# Altium PCB PCB1.PcbDoc
Units mm, origin at the board's own origin, x right, y up, seen from the top; angles counter-clockwise.
Board outline 66.29 x 50.16 mm, 2 copper layers (Top Layer, Bottom Layer); 29 components, 11 nets, 71 pads, 0 vias.
Unrouted connection lines stored in the file: 1.
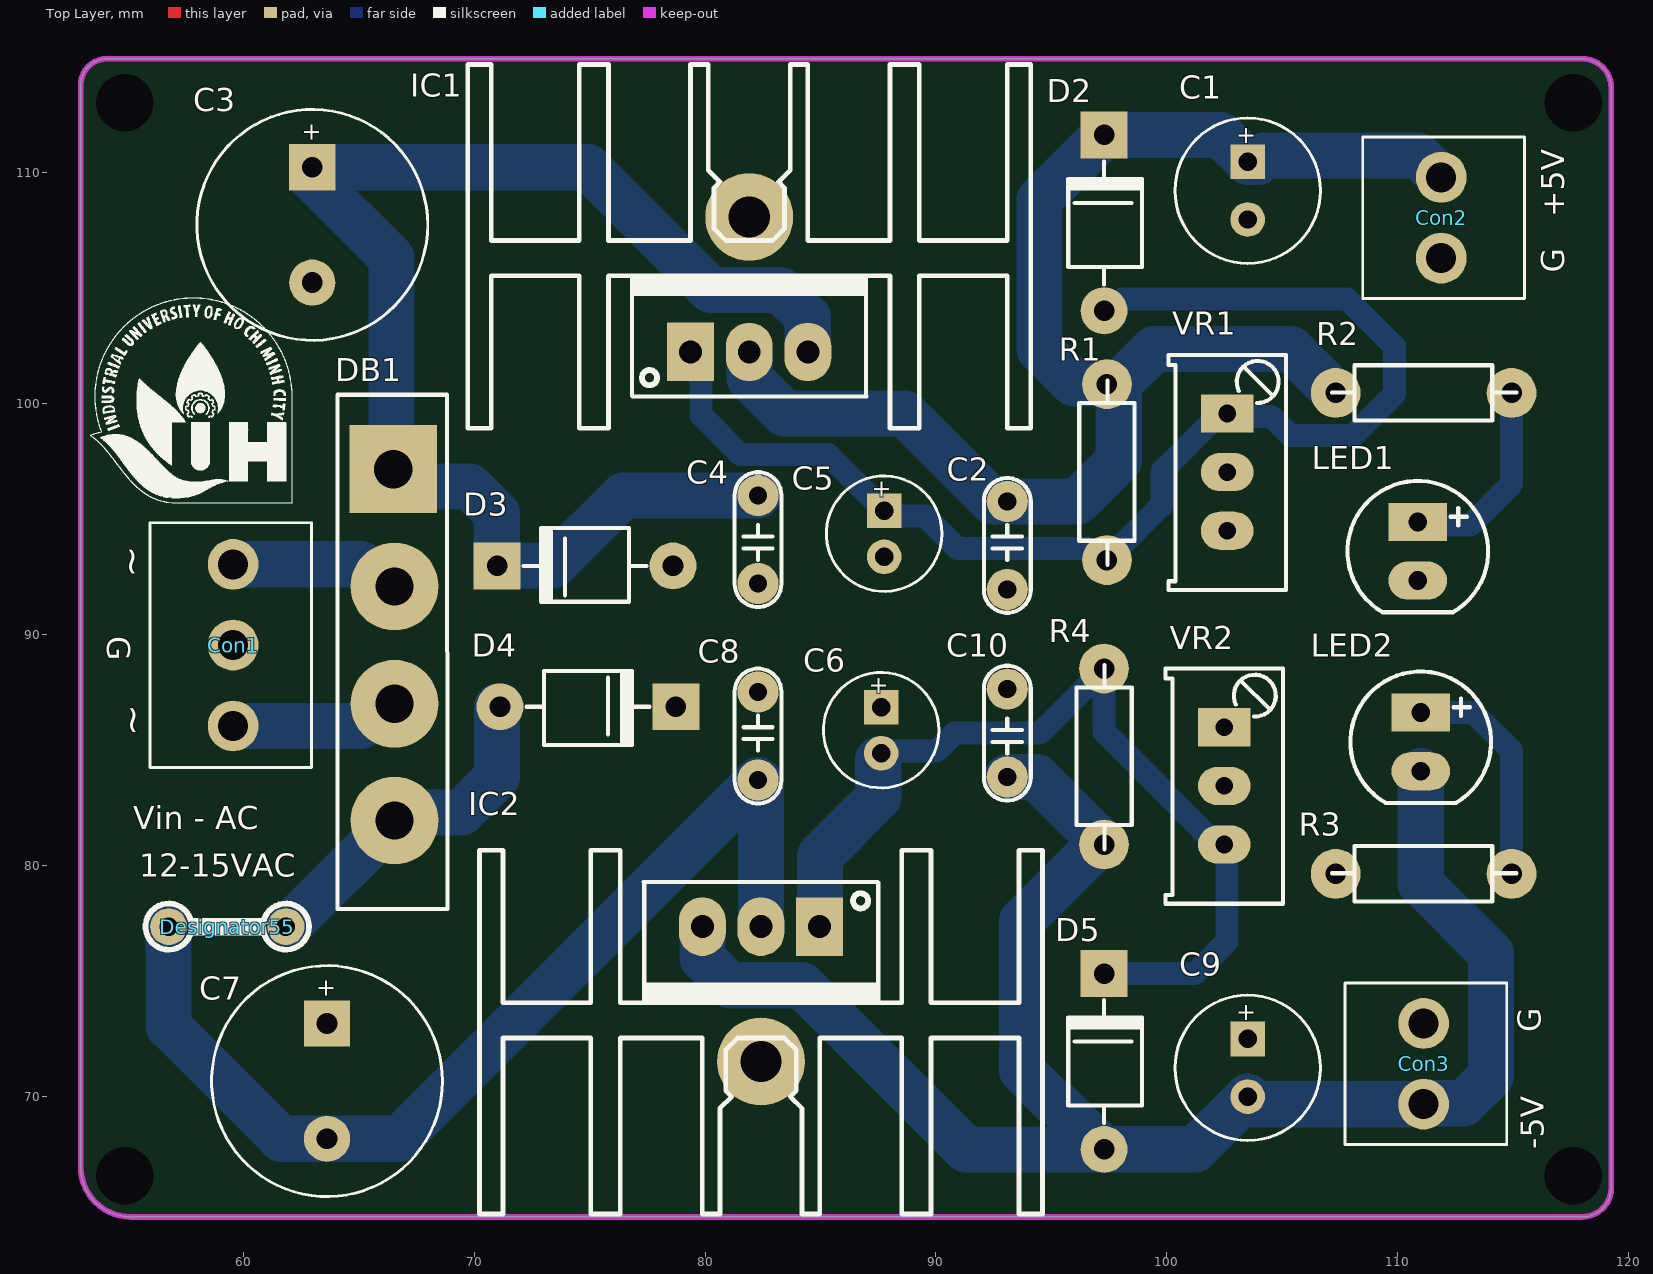
[diagram p0: Top Layer view]
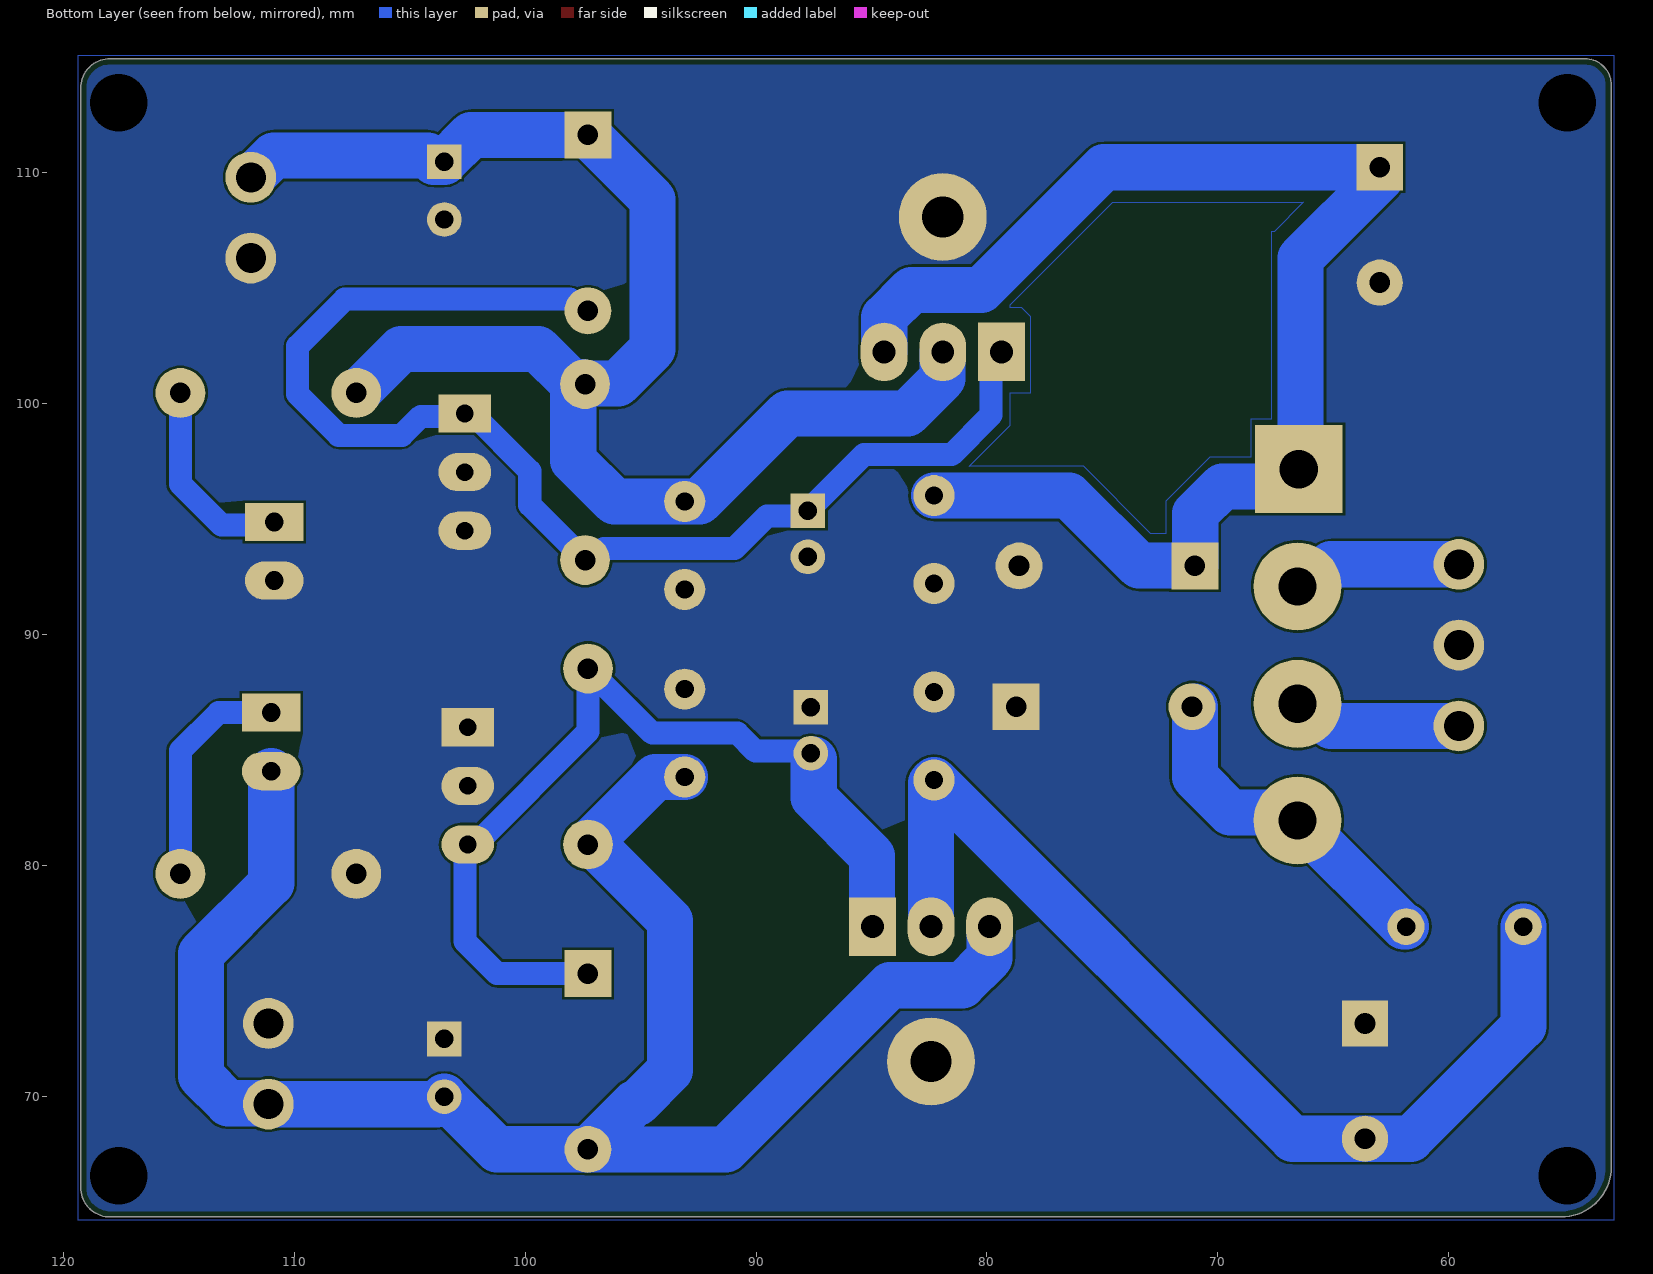
[diagram p1: Bottom Layer view, seen from below]
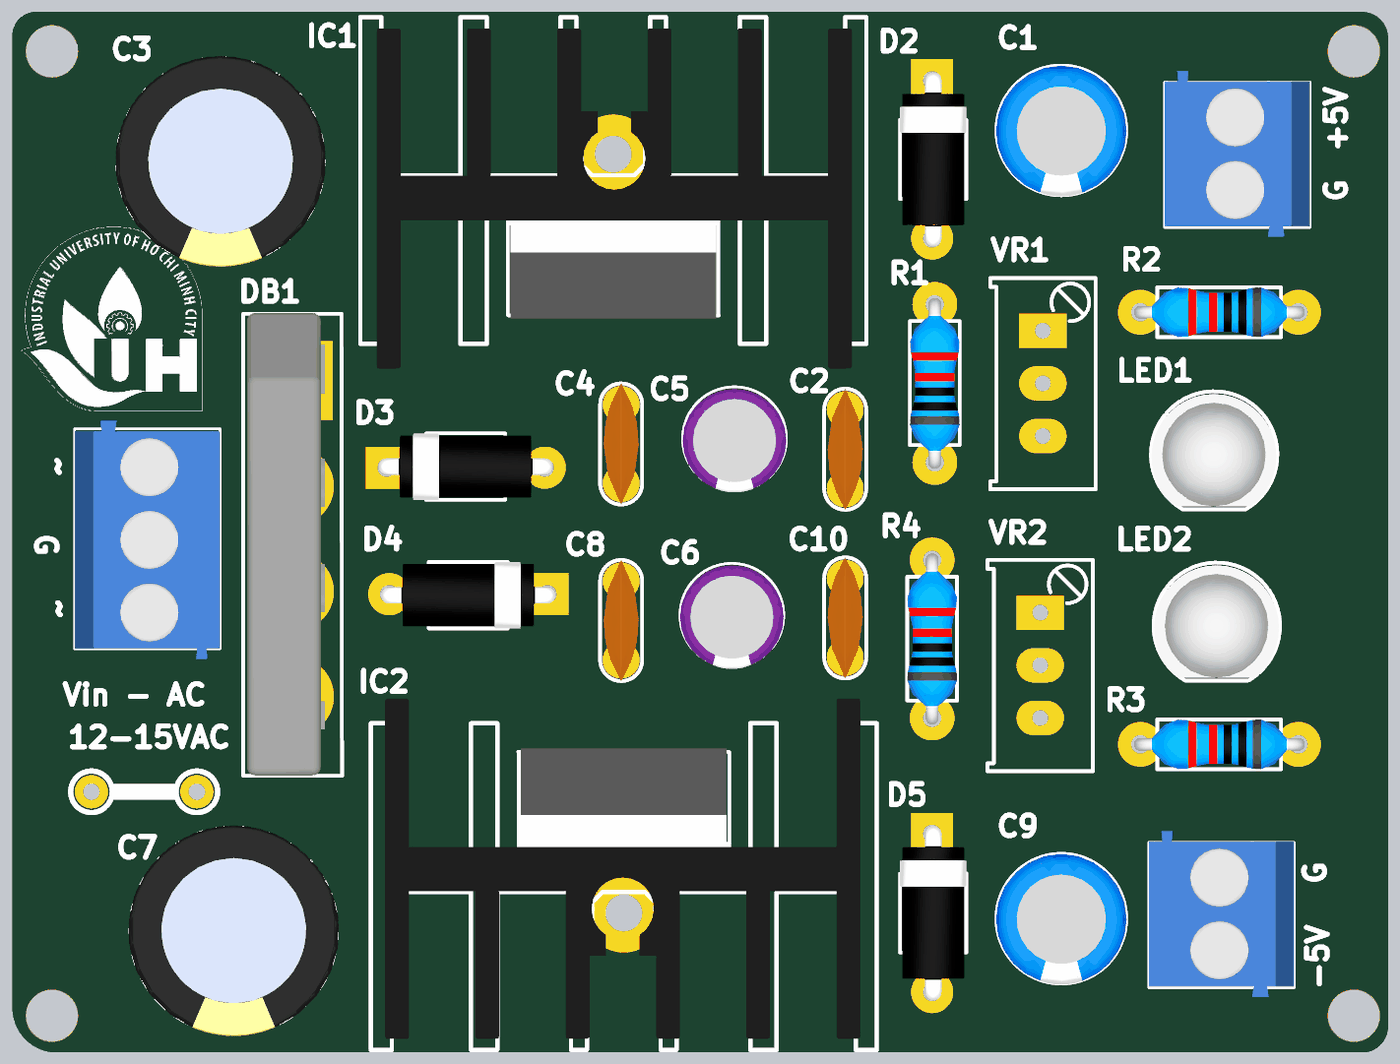
[diagram p2: 3D render of the assembled board from above, using the file's embedded part models]

## Layer stack, top to bottom
Top Solder: solder mask 0.0102, Solder Resist, Dk 3.5
Top Layer: signal copper 0.0356
Dielectric 1: dielectric 0.32, FR-4, Dk 4.8
Bottom Layer: signal copper 0.0356
Bottom Solder: solder mask 0.0102, Solder Resist, Dk 3.5

## Board outline
52.959,66.938 52.959,113.792 cw(c54.102,113.792) 54.102,114.935 54.991,114.935 117.094,114.935 117.983,114.935 cw(c117.983,113.665) 119.253,113.665 119.253,66.04 cw(c117.983,66.04) 117.983,64.77 55.127,64.77 cw(c55.127,66.938)

## Design rules (kind name [scope] priority, off if disabled: settings)
BoardOutlineClearance [All] p1: gap=0.25 ignorepadtopadclearanceinfootprint=FALSE
Clearance [All] p1: gap=0.1 ignorepadtopadclearanceinfootprint=FALSE
PolygonConnect [All] p1: connectstyle=Direct reliefconductorwidth=0.254 reliefentries=4 polygonreliefangle="90 Angle" airgapwidth=0.254
RoutingLayers [All] p1: top layer_v5=FALSE bottom layer_v5=TRUE
RoutingVias [All] p1: holewidth=0.711 width=1.27 viastyle="Through Hole" minholewidth=0.711 minwidth=1.27 maxholewidth=0.711 maxwidth=1.27
SolderMaskExpansion [All] p1: expansion=0 istentingtop=FALSE
SupplyNets "Schematic Supply Nets" [InNet('GND')] p1: voltage=0.000
Width [All] p1: maxlimit=3 minlimit=1 preferedwidth=2
29 further rules are at their usual default settings.

## Components (designator, comment, footprint, x,y, rotation, side; value= is the part's Value field where it differs from the comment)
C1 "470uF" CA-ALU-6.3 103.505,109.22 r270 top
C2 "100nF" CN1.5 93.091,93.98 r270 top value=33pF
C3 "2200uF" CA-ALU-10 62.992,107.736 r270 top
C4 "100nF" CN1.5 82.296,93.98 r90 top value=33pF
C5 "10uF" CA-ALU-5 87.757,94.361 r270 top
C6 "10uF" CA-ALU-5 87.63,85.852 r270 top
C7 "2200uF" CA-ALU-10 63.627,70.652 r270 top
C8 "100nF" CN1.5 82.296,85.725 r270 top value=33pF
C9 "470uF" CA-ALU-6.3 103.505,71.227 r270 top
C10 "100nF" CN1.5 93.091,85.598 r90 top value=33pF
Con1 "JP3" KF3-3.5 59.563,89.535 r270 top
Con2 "JP2" KF2-3.5 111.887,108.049 r90 top
Con3 "JP2" KF2-3.5 111.125,71.402 r90 top
D2 "Diode" DIO-1A-SMALL 97.282,102.743 r270 top value=1N5007
D3 "Diode" DIO-1A-SMALL 79.883,92.964 r0 top value=1N5007
D4 "Diode" DIO-1A-SMALL 69.85,86.868 r180 top value=1N5007
D5 "Diode" DIO-1A-SMALL 97.282,66.421 r270 top value=1N5007
DB1 "Diode Brideg" "DIO-Bri 5A" 66.548,97.155 r270 top value="Cau 1A"
Designator55 "J1" STRAP-5.08 56.769,77.343 r0 top
IC1 "LM317" TO220H2 81.915,102.235 r0 top
IC2 "LM337" TO220H2 82.423,77.343 r180 top
LED1 "LED" LED-5-RED 110.871,94.869 r270 top value="LED 3 ly Single Colour"
LED2 "LED" LED-5-RED 110.998,86.614 r270 top value="LED 3 ly Single Colour"
R1 "120" RES-1/4W-SMALL 97.409,96.774 r90 top
R2 "220" RES-1/4W-SMALL 111.379,100.457 r180 top
R3 "220" RES-1/4W-SMALL 111.379,79.629 r180 top
R4 "120" RES-1/4W-SMALL 97.282,84.455 r90 top
VR1 "5k" VR-S3 102.616,99.568 r270 top value="Volume 50k"
VR2 "5k" VR-S3 102.489,85.979 r270 top value="Volume 50k"

## Footprints (in the part's own frame and the unit in brackets; to place one, negate y for a bottom-side part, rotate by r counter-clockwise, add the part's x,y. Pads: shape width x height; smd on the part's side, far side on the other; paste and mask are expansions set on the pad)
CA-ALU-5 [mm] "Polarized capacitors, Aluminum Electrolytic Capacitors, 2-Leads, Body 5x11x2x0.5"
  rect 1.5x1.5 hole 0.8: 1(-1,0)
  round 1.5 hole 0.8: 2(1,0)
  silkscreen extent -2.5,-2.5 2.5,2.5, body extent -2.41,-2.5 2.59,2.5, height 11
CA-ALU-6.3 [mm] "Polarized capacitors, Aluminum Electrolytic Capacitors, 2-Leads, Body 6.3x15x2.5x0.5"
  rect 1.5x1.5 hole 0.8: 1(-1.25,0)
  round 1.5 hole 0.8: 2(1.25,0)
  silkscreen extent -3.15,-3.15 3.15,3.15, body extent -3.12,-3.15 3.18,3.15, height 11
CA-ALU-10 [mm] "Polarized capacitors, Aluminum Electrolytic Capacitors, 2-Leads, Body 10x20x5x0.6"
  rect 2x2 hole 0.9: 1(-2.5,0)
  round 2 hole 0.9: 2(2.5,0)
  silkscreen extent -5,-5 5,5, body extent -5.08,-5.08 5.08,5.08, height 20.52
CN1.5 [mil]
  round 70 hole 31: 1(-70,0) 2(80,0)
  silkscreen extent -110,-40 120,40, body extent -110,-33 120,33, height 235
DIO-1A-SMALL [mil] "Diode 1A, W 100mil, L 350mil"
  round 80 hole 35: 1(-50,0)
  rect 80x80 hole 35: 2(-350,0)
  silkscreen extent -305,-61 -95,65, body extent -366,-61 -34,65, height 122
"DIO-Bri 5A" [mil] "Brigde 5A"
  rect 150x150 hole 65: 1(0,-2)
  round 150 hole 65: 2(200,0) 3(400,0) 4(599,0)
  silkscreen extent -127,-97 750,90, body extent -129,-90 749,58, height 937
KF2-3.5 [mm] "3,50mm - modular - blue - Horizontal wire entry - Pressure clamp - 8,4mm height - 02p"
  round 2.2 hole 1.3: 1(-1.75,0) 2(1.75,0)
  silkscreen extent -3.5,-3.6 3.5,3.4, body extent -3.95,-3.6 4.05,3.4, height 8.41
KF3-3.5 [mm] "3,50mm - modular - blue - Horizontal wire entry - Pressure clamp - 8,4mm height - 03p"
  round 2.2 hole 1.3: 1(-3.5,0) 2(0,0) 3(3.5,0)
  silkscreen extent -5.3,-3.6 5.3,3.4, body extent -5.7,-3.6 5.8,3.4, height 8.41
LED-5-RED [mil] "LED 2 PIN, 5 ly , Only colour,pin to pin 100mil"
  rect 65x100 hole 32: 1(0,0)
  oval 65x100 hole 32: 2(100,0)
  silkscreen extent -70,-120 154,120, body extent -65,-119 149,118, height 339
RES-1/4W-SMALL [mil]
  round 85 hole 35: 1(-140,0) 2(160,0)
  silkscreen extent -148,-47 166,47, body extent -152,-47 172,47, height 97
STRAP-5.08 [mm]
  round 1.6 hole 0.8: 1(0,0) 2(5.08,0)
  silkscreen extent -1,-1 6.08,1, body extent -0.41,-0.41 5.48,0.41, height 0.9
TO220H2 [mil] "TO-220 - 1-2-3"
  round 150 hole 70: 0(0,230)
  rect 80x100 hole 39: 1(-100,0)
  oval 80x100 hole 39: 2(0,0) 3(100,0)
  silkscreen extent -480,-130 480,490, body extent -449,-177 453,469, height 1206
VR-S3 [mil] "Variable Resistor"
  rect 65x90 hole 30: 1(0,0)
  oval 65x90 hole 30: 2(100,0) 3(200,0)
  silkscreen extent -100,-100 301,100, body extent -91,-98 291,90, height 430

## Part data
C1 C3 C5 C6 C7 C9: library part "Capacitor P", "Polarized"
C2 C4 C8 C10: library part "Capacitor NP", "Non-polarized"
Con1: library part "Header 3", "male/female", Manufacturer="W¨¹rth Elektronik eiSos GmbH", partNo=613003143121, ComponentLink1 Description=Manufacturer, ComponentLink1URL=http://www.we-online.com, ComponentLink2 Description=Datasheet, ComponentLink2URL=http://katalog.we-online.de/em/datasheet/6130xx143121.pdf, Created by="Karrer Zheng", Created Date="29 March 2013", NoPins=03
Con2 Con3: library part "Header 2", "male/female", Manufacturer="W¨¹rth Elektronik eiSos GmbH", partNo=613002143121, ComponentLink1 Description=Manufacturer, ComponentLink1URL=http://www.we-online.com, ComponentLink2 Description=Datasheet, ComponentLink2URL=http://katalog.we-online.de/em/datasheet/6130xx143121.pdf, Created by="Karrer Zheng", Created Date="29 March 2013", NoPins=02
D2 D3 D4 D5: "Default Diode", Code - JEDEC=DO-214-AB, Published=8-Jun-2000, Publisher="Altium Limited", Revision="July-2002: Re-released for DXP Platform."
DB1: library part "Diode Brigde", "Convert AC to DC voltage, 4 pin"
IC1: "Adj Voltage +1.2 -> +37V"
IC2: "On ap (-)     -1.2 -> - 37V"
LED1 LED2: "LED Single colour"
R1 R2 R3 R4: library part Resistor, Manufacturer="Generic Components", Class=Passive, Published=08/06/2000, Publisher="Altium Hobart Technology Centre", SubClass=R
VR1 VR2: library part "Variable Resistor", "Var Res"

## Free pads (board coordinates)
  rrect50% 1.524x1.524 hole 2.5: 2(54.864,66.548) 2(54.864,113.03) 2(117.602,66.548) 2(117.602,113.03)

## Nets (pads, with @x,y where several pads share a name; then routed paths per layer and width w, separated by ;. In a path a pad name is that pad's centre, name@x,y a point inside that pad or via, vN(x,y) a via of type N, cw(c..) or ccw(c..) an arc to the next point about the centre after c; other vN are vias at no path point)
+5V: C1.1 C2.1 Con2.2 D2.2 IC1.2 R1.2 R2.2 | length 64.5
  Bottom Layer w2: IC1.2 81.921,102.229 81.921,101.086 83.439,99.568 88.646,99.568 92.456,95.758 96.139,95.758 97.917,97.536 97.917,100.287 97.409,100.795 R1.2 ; R2.2 107.285,100.487 107.242,100.487 105.367,102.362 99.441,102.362 97.996,100.917 97.532,100.917 97.452,100.838 R1.2 ; Con2.2 111.833,109.799 110.888,110.744 104.218,110.744 103.944,110.47 C1.1 102.342,111.633 D2.2 94.488,108.839 94.488,102.362 95.982,100.868 97.379,100.868 R1.2
+12V: C3.1 C4.2 D3.2 DB1.1 IC1.3 | length 60.3
  Bottom Layer w2: C4.2 76.454,96.012 73.422,92.98 71.009,92.98 D3.2 70.977,92.98 70.977,95.239 69.805,96.411 67.242,96.411 66.421,97.231 66.421,106.299 62.992,109.728 C3.1 74.93,110.236 80.248,104.918 83.267,104.918 84.449,103.737 84.449,102.241 IC1.3
-5V: C9.2 C10.1 Con3.1 D5.1 IC2.3 LED2.2 R4.1 | length 76.8
  Bottom Layer w2: IC2.3 79.889,77.337 79.889,75.984 81.071,74.803 84.201,74.803 91.313,67.691 D5.1 ; C10.1 94.361,83.82 R4.1 97.252,80.869 96.998,80.869 93.726,77.597 93.726,71.12 95.14,69.706 95.259,69.706 97.273,67.691 D5.1 ; LED2.2 110.998,79.224 114.046,76.176 114.046,70.872 112.864,69.69 111.163,69.69 Con3.1 103.83,69.652 C9.2 101.225,67.697 97.288,67.697 D5.1
-12V: C7.2 C8.2 D4.1 DB1.4 Designator55.1 Designator55.2 IC2.2 | length 59.6
  Bottom Layer w2: Designator55.1 56.769,73.025 61.642,68.152 C7.2 66.755,68.152 C8.2 82.423,83.566 IC2.2 ; Designator55.2 61.951,77.343 DB1.4 66.894,82.287 69.46,82.287 70.993,83.82 D4.1@70.993,86.868
GND: C1.2 C2.2 C3.2 C4.1 C5.2 C6.1 C7.1 C8.1 C9.1 C10.2 Con1.2 Con2.1 Con3.2 D3.1 D4.2 IC1.0 IC2.0 LED1.2 pad.2 R3.2 VR1.2 VR1.3 VR2.1 VR2.2
NetC5_1: C5.1 D2.1 IC1.1 R1.1 VR1.1 | length 55.9
  Bottom Layer w1: IC1.1 79.828,101.782 79.828,99.496 81.534,97.79 85.328,97.79 C5.1 87.995,95.123 89.535,95.123 90.932,93.726 96.587,93.726 97.095,93.218 R1.1 99.802,95.611 99.802,97.071 102.298,99.568 VR1.1 102.743,99.441 104.521,99.441 105.339,98.623 108.074,98.623 109.855,100.404 109.855,102.489 107.823,104.521 98.069,104.521 97.561,104.013 D2.1
NetC6_2: C6.2 D5.2 IC2.1 R4.2 VR2.3 | length 39.6
  Bottom Layer w1: C6.2 87.726,84.948 90.028,84.948 90.805,85.725 94.488,85.725 R4.2 97.282,85.788 102.171,80.899 VR2.3 102.616,80.772 102.616,76.708 101.219,75.311 D5.2
  Bottom Layer w2: IC2.1 84.979,77.359 84.979,80.407 87.503,82.931 C6.2@87.503,84.582
NetCon1_1: Con1.1 DB1.2 | length 7.4
  Bottom Layer w2: Con1.1 65.098,93.035 66.058,92.075 DB1.2
NetCon1_3: Con1.3 DB1.3 | length 7.4
  Bottom Layer w2: Con1.3 65.098,86.035 66.058,86.995 DB1.3
NetLED1_1: LED1.1 R2.1 | length 8.8
  Bottom Layer w1: LED1.1 110.998,94.742 113.157,94.742 114.935,96.52 R2.1
NetLED2_1: LED2.1 R3.1 | length 10
  Bottom Layer w1: LED2.1 113.284,86.614 114.935,84.963 R3.1

## Polygon pours and split planes (outlines as drawn)
GND on Bottom Layer "NONET_L-01_P-001" (solid, remove dead copper, pour order 8): 119.38,64.643 119.38,115.062 52.832,115.062 52.832,64.643
GND on Bottom Layer "NONET_L-01_P-001" (solid, remove dead copper, shelved, pour order 6): 119.38,115.062 119.38,64.643 52.832,64.643 52.832,115.062
no net on Bottom Layer "NONET_L-01_P-001" (solid, shelved, pour order 1): 67.691,99.314 68.58,99.314 68.58,97.663 70.358,97.663 72.263,95.758 72.263,94.361 72.898,94.361 75.819,97.282 80.772,97.282 78.994,99.06 78.994,100.457 78.105,100.457 78.105,103.759 78.486,104.14 78.994,104.14 78.994,104.267 74.549,108.712 66.294,108.712 67.564,107.442 67.691,107.442 67.691,100.076

## Keep-outs
Top Layer:
  lines w0.254: 52.959,66.938 ccw(c55.127,66.938) 55.127,64.77 117.475,64.77 117.983,64.77 ccw(c117.983,66.04) 119.253,66.04 119.253,113.665 ccw(c117.983,113.665) 117.983,114.935 117.094,114.935 54.991,114.935 54.102,114.935 ccw(c54.102,113.792) 52.959,113.792 52.959,66.938

## Silkscreen, mask and mechanical layers (free items; w line width, h text height)
Top Overlay:
  drawing of 76 lines, arcs and shapes, not listed
  text "+5V" at 117.221,108.077 h1 r90
  text "G" at 117.221,105.664 h1 r90
  text "~" at 55.689,92.456 h1.2 r90
  text "G" at 54.102,89.916 h1 r270
  text "~" at 55.737,85.598 h1.2 r90
  text "Vin - AC" at 55.245,81.55 h1
  text "12-15VAC" at 55.499,79.502 h1
  text "G" at 116.205,72.771 h1 r90
  text "-5V" at 116.332,67.691 h1 r90

## Text inside footprints (layer, text, board x,y; h text height)
C1: Top Overlay "+" at 103.124,112.039 h0.76 r270
C3: Top Overlay "+" at 62.636,112.181 h0.76 r270
C5: Top Overlay "+" at 87.325,96.723 h0.76 r270
C6: Top Overlay "+" at 87.198,88.214 h0.76 r270
C7: Top Overlay "+" at 63.271,75.097 h0.76 r270
C9: Top Overlay "+" at 103.124,74.046 h0.76 r270